# Altium PCB Booster_USER_IFC_W5500.PcbDoc (part 2 of 2)
Units mm, origin at the board's own origin, x right, y up, seen from the top; angles counter-clockwise.
Board outline 78 x 45 mm, 2 copper layers (Top Layer, Bottom Layer), stack 1.571 mm thick; 87 components, 93 nets, 348 pads, 108 vias.
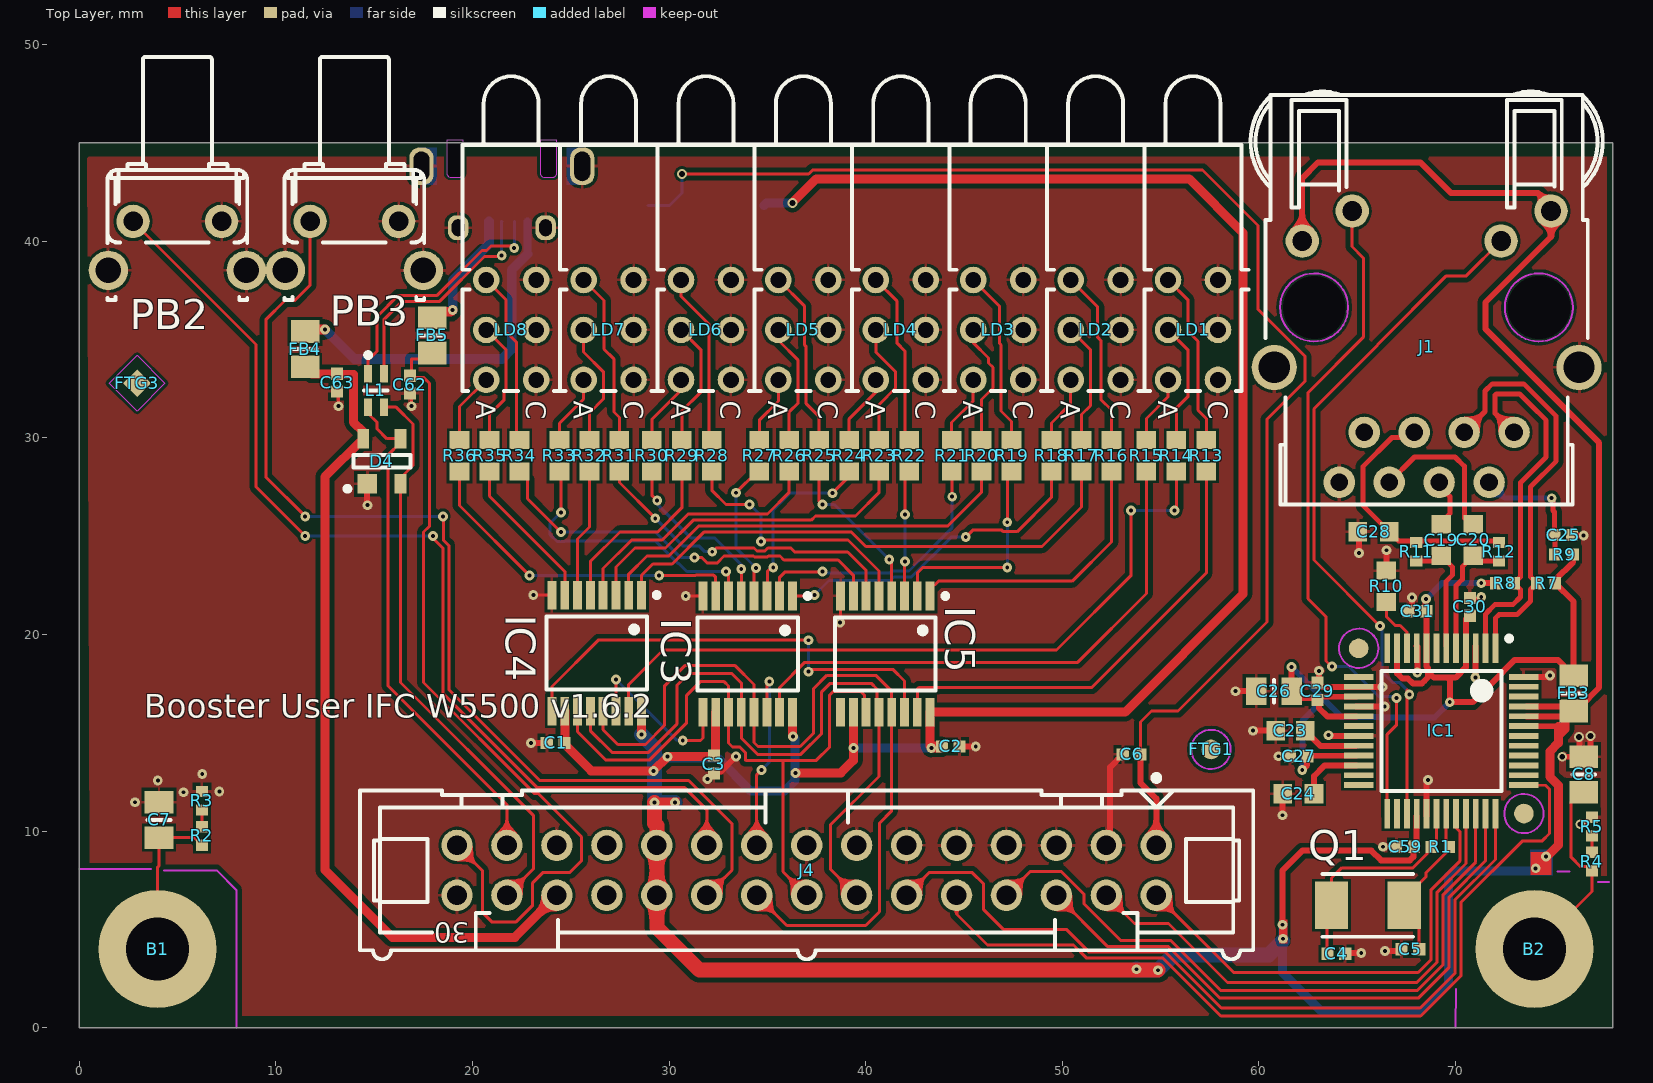
[diagram p0: Top Layer view]

## Via types
v1: diameter 0.5, hole 0.2, Top Layer to Bottom Layer, tented both sides, 102 vias
v2: diameter 0.5, hole 0.3, Top Layer to Bottom Layer, tented both sides, 5 vias
v3: diameter 0.5, hole 0.3, Top Layer to Bottom Layer, 1 vias

## Nets (pads, with @x,y where several pads share a name; then routed paths per layer and width w, separated by ;. In a path a pad name is that pad's centre, name@x,y a point inside that pad or via, vN(x,y) a via of type N, cw(c..) or ccw(c..) an arc to the next point about the centre after c; other vN are vias at no path point) (continued)
P3V3: (continued)
  Top Layer w0.762: v1(29.265,11.455) 29.265,10.389 29.38,10.273 J4.21 J4.22 29.38,5.092 31.551,2.921 v1(54.868,2.921)
  Bottom Layer w0.457: 29.5,13.7 29.925,13.7 32.5,13.7 34.166,12.034 35.872,12.034 36.419,12.582 36.419,12.946 v1(36.427,12.954) ; SW1.2 34.958,41.935 v2(36.275,41.935) ; v1(36.3,14.8) 36.4,14.7 v1@36.4,12.954 ; v1(39.375,14.225) v1(43.337,14.225) ; v1@61.218,5.232 v1(61.218,4.521) 61.218,4.418 61.2,4.4 61.2,2.8 63.136,0.864 68.279,0.864 69.64,2.225 69.64,7.708 69.908,7.976 74.019,7.976 74.036,7.993 74.036,8.136 v1(74.6,8.7)
  Bottom Layer w0.762: v1(28.6,14.9) 29.265,14.235 v1(29.265,11.455) v1(30.306,11.455) ; v1(53.776,2.972) 53.826,2.921 v1(54.868,2.921) 55.647,3.7 60.5,3.7 v1@61.2,4.4
P3V3A: C26.1 C27.1 C29.1 C30.1 C31.1 FB3.2 IC1.4 IC1.8 IC1.11 IC1.15 IC1.17 IC1.21 R7.2 R8.2 R9.1 | length 55.7
  Top Layer w0.305: v1(61.661,18.339) C26.1 62.011,16.759 C29.1@63.047,16.759 ; v1(62.2,13.1) 62.45,13.35 62.45,13.8 62.477,13.827 IC1.21@64.945,13.827 ; IC1.17@64.945,15.827 63.473,15.827 63.047,16.253 C29.1@63.047,16.759 ; IC1.15@64.945,16.827 63.115,16.827 C29.1@63.047,16.759 ; IC1.11@67.02,19.402 67.02,18.02 67.285,17.755 67.57,17.755 67.821,17.505 68.28,17.505 68.405,17.629 68.605,17.83 68.605,18.095 ; v1(68.5,21.8) 68.477,21.777 68.477,21.173 68.52,21.13 68.52,18.374 68.605,18.289 68.605,18.095 ; C30.1@70.8,21.05 70.52,20.77 70.52,18.32 70,17.8 69.6,17.8 ; v1(71.3,22.6) R8.2 ; 75.97,23.67 75.07,22.77 R7.2 76,21.67 FB3.2 75.2,18.7 73.001,18.7 72.415,18.114 72.415,18.106 70.859,16.55 v1(69.7,16.55) 69.7,17.7 69.6,17.8 ; 68.605,18.095 68.9,17.8 69.6,17.8
  Bottom Layer w0.305: v1(61.661,18.339) 63.3,16.7 ; v1(62.2,13.1) 62.2,15.6 63.3,16.7 ; v1(68.5,21.8) 69.3,22.6 v1(71.3,22.6) ; v1(69.7,16.55) 68.922,15.772 66.143,15.772 66.115,15.8 64.2,15.8 63.3,16.7
RESETN: IC1.37 J4.10 | length 42.8
  Top Layer w0.152: J4.10 44.62,5.78 46.2,4.2 50.569,4.2 51.238,3.531 55.12,3.531 58.056,0.595 68.222,0.595 70.26,2.633 70.26,6.36 73.405,9.505 74.406,9.505 74.77,9.869 74.77,12.13 74.573,12.327 IC1.37@73.595,12.327
RJ45_GRN: IC1.27 J1.D2 | length 36.5
  Top Layer w0.152: v1(66.145,20.422) 62.793,23.774 62.793,31.469 66.024,34.7 66.024,34.724 69.527,38.227 70.538,38.227 J1.D2 ; IC1.27@67.52,10.752 67.52,17.18 67.644,17.056 v1(67.644,16.942)
  Bottom Layer w0.152: v1(66.145,20.422) 66.247,20.32 66.247,18.116 66.822,17.541 67.159,17.541 67.644,17.056 v1(67.644,16.942)
RJ45_RX_C_N: C20.2 J1.6 | length 7.8
  Top Layer w0.254: J1.6 67.908,29.018 69.969,29.018 70.438,28.55 70.438,25.908 70.746,25.6 C20.2
RJ45_RX_C_P: C19.2 J1.4 | length 2.4
  Top Layer w0.254: J1.4@69.15,27.55 69.7,27 69.7,26.135 69.27,25.705 C19.2
RJ45_RX_N: C20.1 IC1.5 R12.2 | length 6.4
  Top Layer w0.254: IC1.5@70.02,19.402 70.02,20.354 70.024,20.358 70.024,22.485 70.339,22.8 70.339,23.439 C20.1 71.17,23.73 R12.2
RJ45_RX_P: C19.1 IC1.6 R11.2 | length 6.3
  Top Layer w0.254: R11.2 69.007,23.73 C19.1 69.831,23.432 69.831,23.01 69.516,22.695 69.516,20.358 69.52,20.354 IC1.6@69.52,19.402
RJ45_TX_N: IC1.1 J1.3 R7.1 | length 20.8
  Top Layer w0.254: J1.3 71.492,31.332 71.492,32.372 71.86,32.741 73.461,32.741 75.108,31.093 75.108,28.808 73.804,27.504 73.804,22.926 R7.1 73.808,22.278 73.808,21.69 73.118,21 72.2,21 72.02,20.82 IC1.1@72.02,19.402
RJ45_TX_P: IC1.2 J1.1 R8.1 | length 19
  Top Layer w0.254: IC1.2@71.52,19.402 71.52,21.038 71.99,21.508 72.908,21.508 73.3,21.9 73.3,22.27 R8.1 73.296,22.926 73.296,27.714 74.6,29.018 74.6,30.883 73.834,31.648 73.25,32.233 73.211,32.233 72.071,32.233 72,32.162 72,31.24 J1.1
RJ45_YEL: IC1.25 J1.D4 | length 35.2
  Top Layer w0.152: v1(63.707,18.364) 63.682,18.364 63.402,18.644 63.402,20.898 62.488,21.812 62.488,32.288 65.307,35.107 65.307,39.141 64.731,39.718 J1.D4@64.731,41.522 ; IC1.25@66.52,10.752 66.52,14.92 67,15.4 v1@67,16.764
  Bottom Layer w0.152: v1(63.707,18.364) 64.559,18.364 66.038,16.885 66.075,16.848 66.941,16.848 v1@67,16.789
  other v1: 66.984,16.764
SPI1_MISO: IC1.34 J4.8 | length 34.3
  Top Layer w0.152: J4.8 48.367,7.937 49.948,7.937 51.1,6.785 51.1,6.3 52.955,4.445 55.499,4.445 58.044,1.9 68.055,1.9 69.346,3.19 69.346,6.739 71.02,8.413 IC1.34@71.02,10.752
SPI1_MOSI: IC1.35 J4.6 | length 31.2
  Top Layer w0.152: J4.6 52.29,4.14 55.373,4.14 58.013,1.5 68.1,1.5 69.651,3.051 69.651,6.613 71.52,8.482 IC1.35@71.52,10.752
SPI1_NSS: IC1.32 J4.2 | length 23.8
  Top Layer w0.152: J4.2 58.71,2.8 68.093,2.8 68.736,3.443 68.736,6.991 70.209,8.465 70.209,9.975 70.02,10.164 IC1.32@70.02,10.752
SPI1_SCK: IC1.33 J4.4 | length 27.1
  Top Layer w0.152: J4.4 53.67,5.3 55.4,5.3 58.4,2.3 68.024,2.3 69.041,3.317 69.041,6.865 70.52,8.344 IC1.33@70.52,10.752
pads on no net: FTG1.FTG2 FTG2.FTG2 FTG3.1 FTG4.1 IC1.7 IC1.12 IC1.13 IC1.18 IC1.23 IC1.24 IC1.26 IC1.38 IC1.39 IC1.40 IC1.41 IC1.42 IC1.46 IC1.47 IC1.FTG1 IC1.FTG2 IC5.9 J1.7 J1.M1 J1.M2 J2.PastePad J4.23 J4.24

## Polygon pours and split planes (outlines as drawn)
GND on Bottom Layer "Top-No Net" (solid, remove dead copper, pour order 0): 0.563,44 77,44 77,1 0.563,1
GND on Top Layer "GND_L01_P001" (solid, remove dead copper, pour order 1): 0.418,44.288 77.677,44.288 77.677,0.595 0.567,0.595

## Keep-outs
Bottom Layer:
  lines w0.1: 3.382,7.95 4.754,7.95 ; 75.797,8 77.88,8
Keep-Out Layer:
  lines w0.1: 0.029,8.077 3.661,8.077 ; 4.323,8 7,8 8,7 8,0 ; 64.53,36.592 cw(c62.8,36.622) 64.53,36.644 ; 70,0 70.006,1.956 ; 75.173,7.95 75.797,7.95 ; 75.961,36.592 cw(c74.23,36.622) 75.961,36.644 ; 77.24,7.409 77.786,7.409

## Other copper
Top Layer:
  rectangle net P3V3: 61.015,4.293 61.446,5.512
  rectangle net P3V3: 73.816,7.772 74.883,8.941
  rectangle net P3V3: 53.445,2.667 55.071,3.226
  rectangle net P3V3: 29.011,11.176 30.535,11.709
Bottom Layer:
  rectangle net P3V3: 73.791,7.747 74.948,9.048

## Silkscreen, mask and mechanical layers (free items; w line width, h text height)
Top Overlay:
  text "Booster User IFC W5500 v1.6.2" at 3.306,15.748 h1.2
Mechanical 1:
  drawing of 198 lines, arcs and shapes, not listed
  text "Layer" at -6.337,-8.661 h1.52
  text "Name" at 4.074,-8.661 h1.52
  text "Material" at 27.69,-8.661 h1.52
  text "Thickness" at 49.528,-8.661 h1.52
  text "Constant" at 66.034,-8.661 h1.52
  text "Board Layer Stack" at 80.508,-8.661 h1.52
  text "Top Overlay" at 4.074,-11.709 h1.52
  text "Top Solder" at 4.074,-14.757 h1.52
  text "Solder Resist" at 27.69,-14.757 h1.52
  text "0,010mm" at 49.528,-14.757 h1.52
  text "3.5" at 66.034,-14.757 h1.52
  text "1" at -6.337,-17.805 h1.52
  text "Top Layer" at 4.074,-17.805 h1.52
  text "0,036mm" at 49.528,-17.805 h1.52
  text "Dielectric 1" at 4.074,-20.853 h1.52
  text "FR-4" at 27.69,-20.853 h1.52
  text "1,500mm" at 49.528,-20.853 h1.52
  text "4.8" at 66.034,-20.853 h1.52
  text "2" at -6.337,-23.901 h1.52
  text "Bottom Layer" at 4.074,-23.901 h1.52
  text "0,036mm" at 49.528,-23.901 h1.52
  text "Bottom Solder" at 4.074,-26.949 h1.52
  text "Solder Resist" at 27.69,-26.949 h1.52
  text "0,010mm" at 49.528,-26.949 h1.52
  text "3.5" at 66.034,-26.949 h1.52
  text "Bottom Overlay" at 4.074,-29.997 h1.52

## Text inside footprints (layer, text, board x,y; h text height)
J2: Drill Drawing "0.85" at 19.998,47.916 h1 r180; Drill Drawing "1.87" at 21.141,45.311 h1 r90; Drill Drawing "r0.2" at 23.8,42.3 h1 r180; Mechanical 8 "PCB end" at 17.2,46.075 h0.5 r180
J4: Top Overlay "30" at 19.855,5.333 h1.02 r180; Mechanical 14 "30" at 19.855,5.333 h1.02 r180
LD1: Top Overlay "A" at 54.867,31.873 h1 r270; Top Overlay "C" at 57.407,31.873 h1 r270; Mechanical 14 "A" at 54.845,31.878 h1 r270; Mechanical 14 "C" at 57.445,31.878 h1 r270
LD2: Top Overlay "A" at 49.914,31.873 h1 r270; Top Overlay "C" at 52.454,31.873 h1 r270; Mechanical 14 "A" at 49.892,31.878 h1 r270; Mechanical 14 "C" at 52.492,31.878 h1 r270
LD3: Top Overlay "A" at 44.961,31.873 h1 r270; Top Overlay "C" at 47.501,31.873 h1 r270; Mechanical 14 "A" at 44.939,31.878 h1 r270; Mechanical 14 "C" at 47.539,31.878 h1 r270
LD4: Top Overlay "A" at 40.008,31.873 h1 r270; Top Overlay "C" at 42.548,31.873 h1 r270; Mechanical 14 "A" at 39.986,31.878 h1 r270; Mechanical 14 "C" at 42.586,31.878 h1 r270
LD5: Top Overlay "A" at 35.055,31.873 h1 r270; Top Overlay "C" at 37.595,31.873 h1 r270; Mechanical 14 "A" at 35.033,31.878 h1 r270; Mechanical 14 "C" at 37.633,31.878 h1 r270
LD6: Top Overlay "A" at 30.102,31.873 h1 r270; Top Overlay "C" at 32.642,31.873 h1 r270; Mechanical 14 "A" at 30.08,31.878 h1 r270; Mechanical 14 "C" at 32.68,31.878 h1 r270
LD7: Top Overlay "A" at 25.149,31.873 h1 r270; Top Overlay "C" at 27.689,31.873 h1 r270; Mechanical 14 "A" at 25.127,31.878 h1 r270; Mechanical 14 "C" at 27.727,31.878 h1 r270
LD8: Top Overlay "A" at 20.196,31.873 h1 r270; Top Overlay "C" at 22.736,31.873 h1 r270; Mechanical 14 "A" at 20.174,31.878 h1 r270; Mechanical 14 "C" at 22.774,31.878 h1 r270